# Altium PCB Micro1.PcbDoc
Units mm, origin at the board's own origin, x right, y up, seen from the top; angles counter-clockwise.
Board outline 100 x 50 mm, 2 copper layers (Top Layer, Bottom Layer); 15 components, 27 nets, 103 pads, 20 vias.
Unrouted connection lines stored in the file: 3.
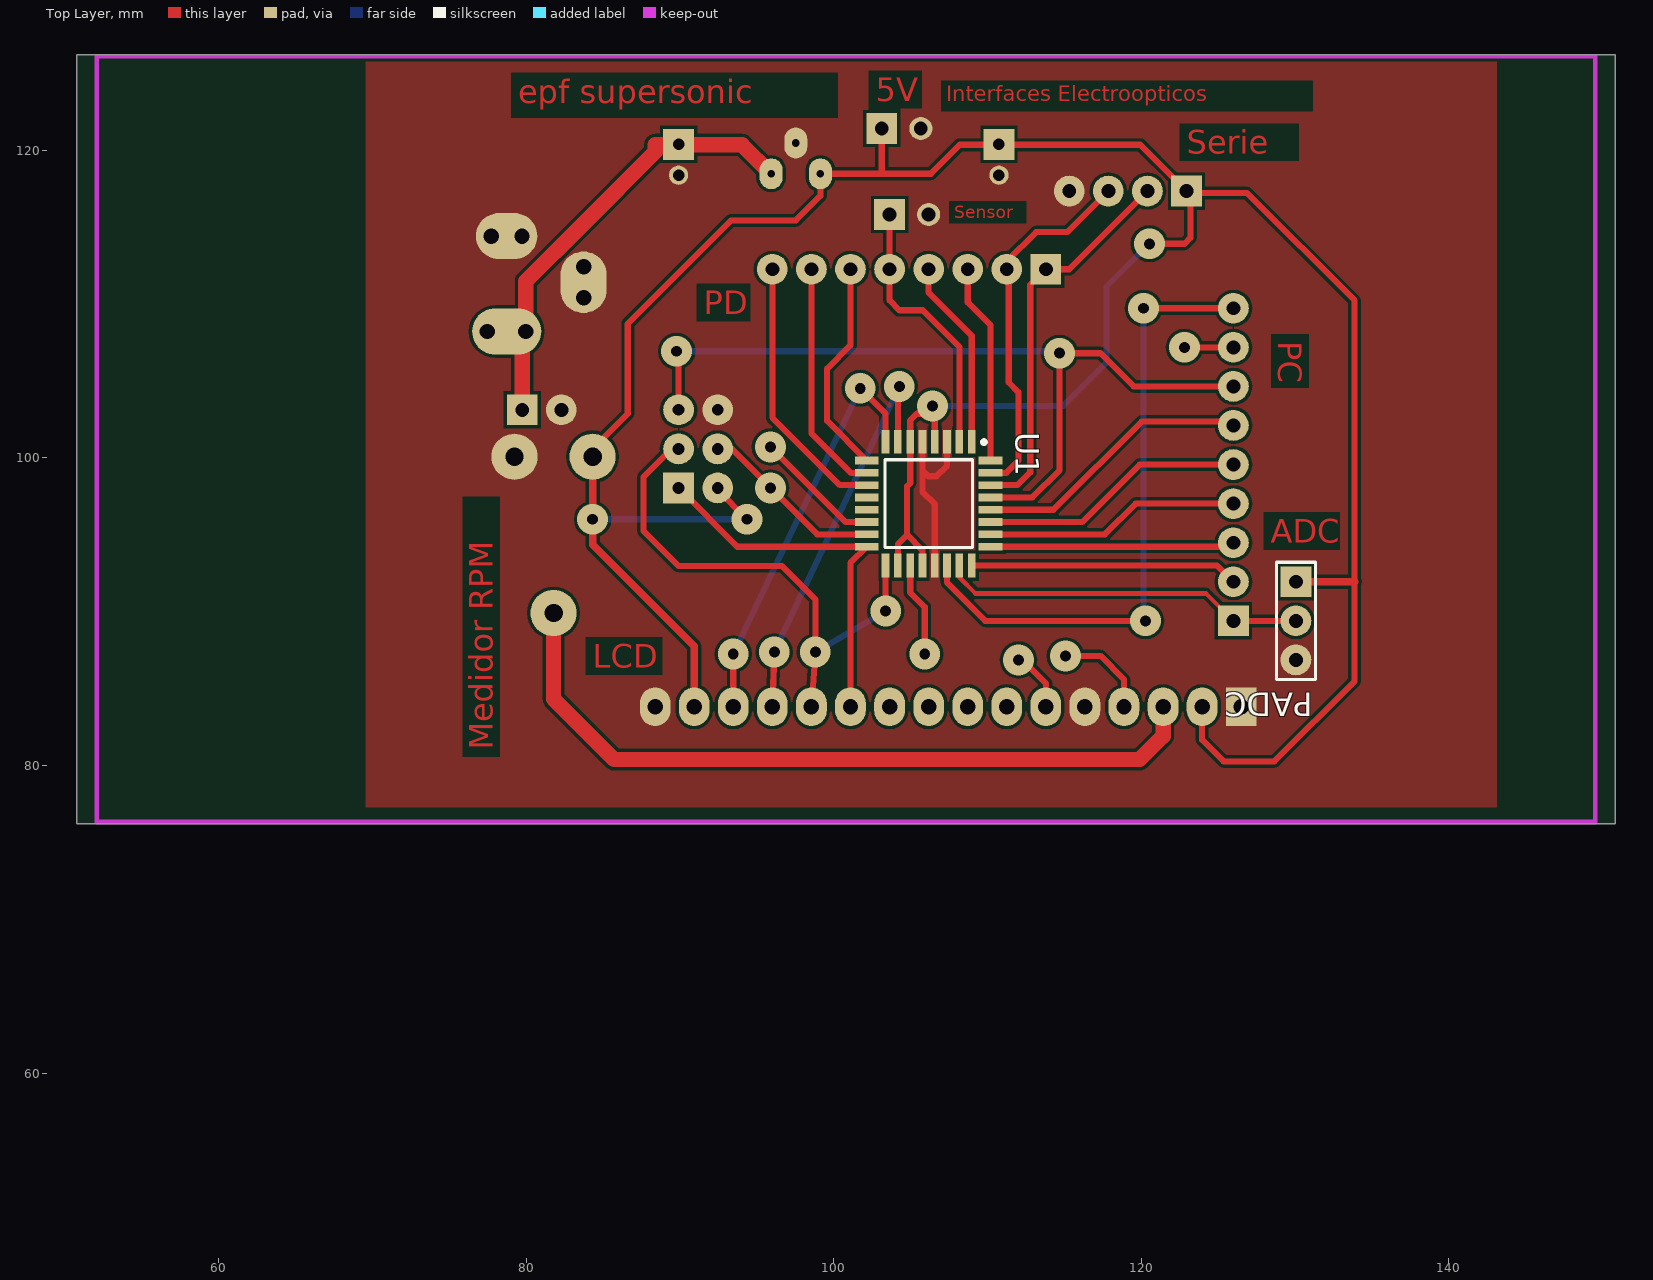
[diagram p0: Top Layer view]
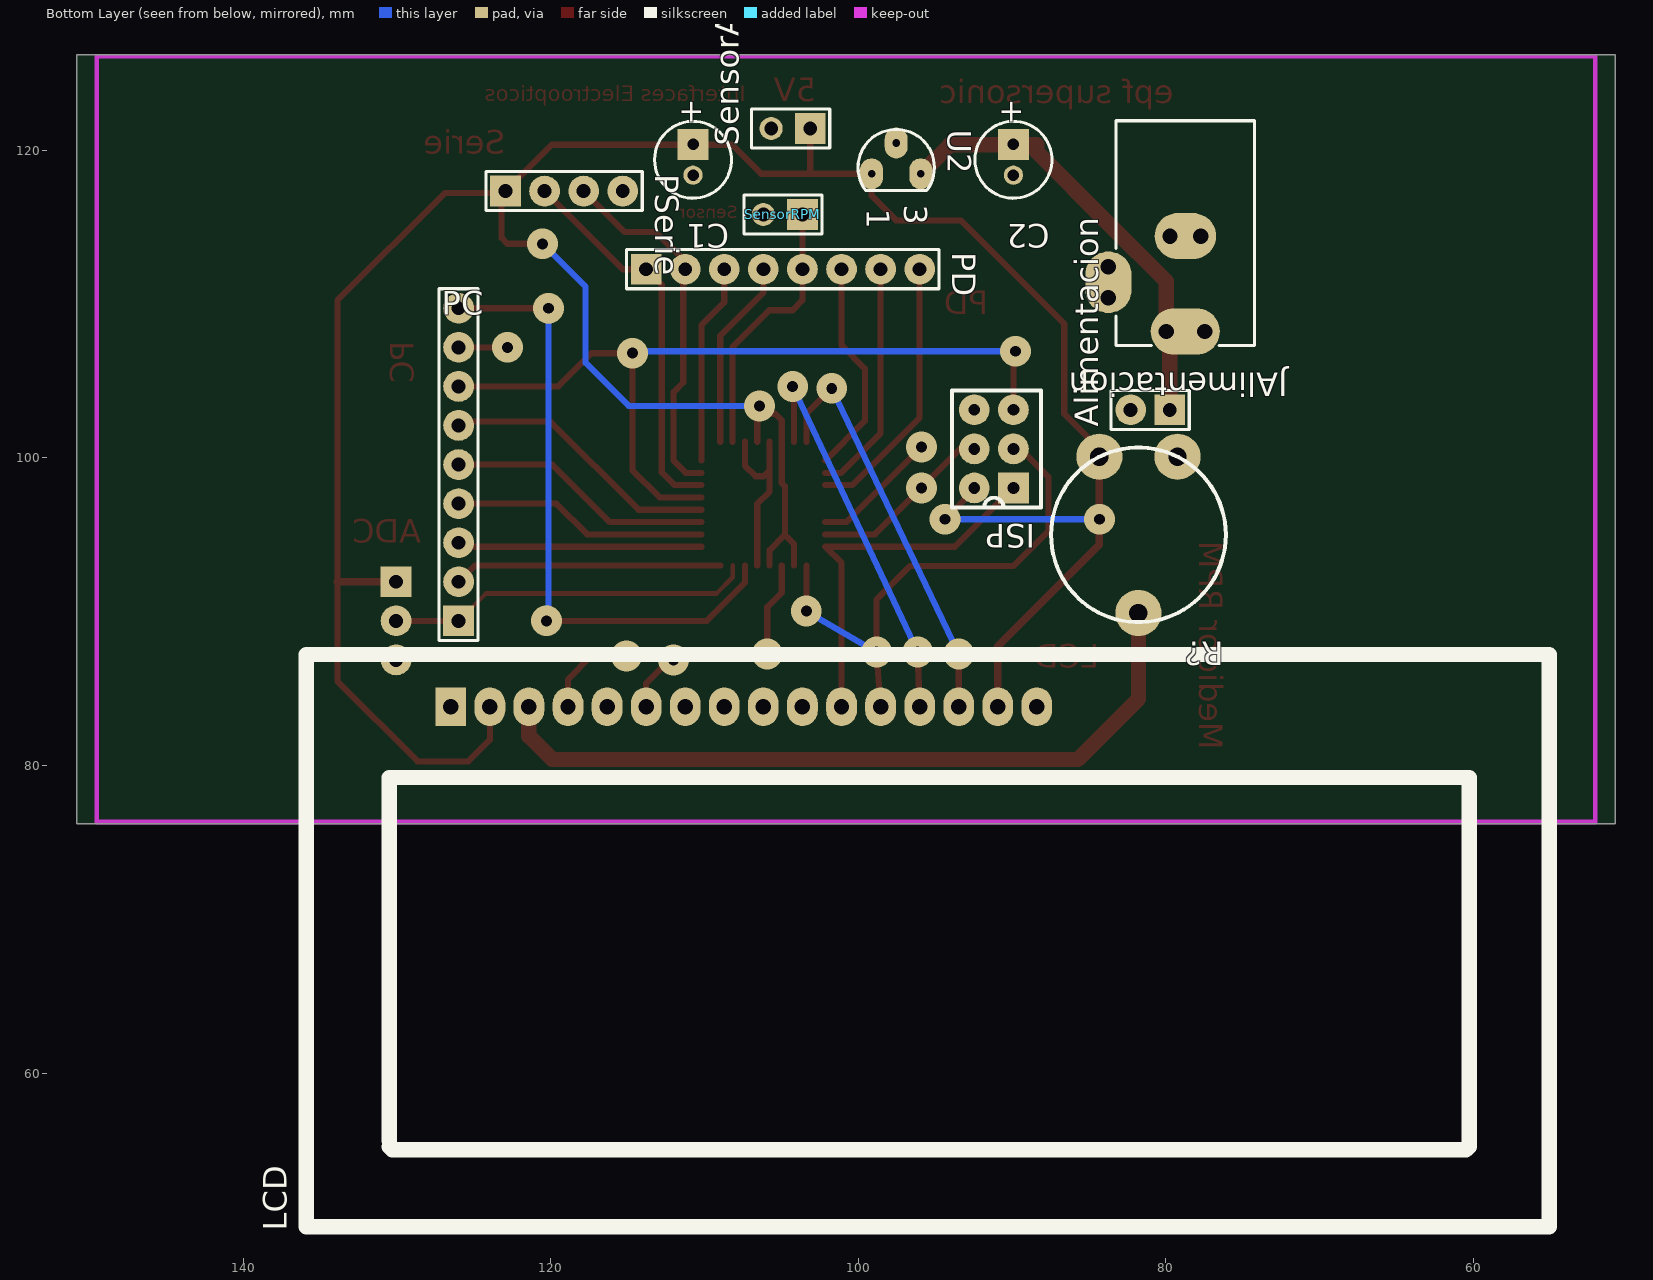
[diagram p1: Bottom Layer view, seen from below]

## Layer stack, top to bottom
Top Layer: signal copper 0.0356
Dielectric: dielectric 0.32, FR-4, Dk 4.8
Bottom Layer: signal copper 0.0356

## Board outline
50.8,76.2 150.8,76.2 150.8,126.2 50.8,126.2

## Design rules (kind name [scope] priority, off if disabled: settings)
Clearance [All] p1: gap=0.2
ComponentClearance [All] p1: gap=0.254 collisioncheckmode=3 verticalgap=0.254
PlaneConnect [All] p1: planeconnectstyle=Direct reliefexpansion=0.508 reliefentries=4 reliefconductorwidth=0.254 reliefairgap=0.254
PolygonConnect [All] p1: connectstyle=Direct reliefconductorwidth=0.254 reliefentries=4 polygonreliefangle="90 Angle"
RoomDefinition microprocesador [InComponentClass('microprocesador')] p1: confinementstyle=ConfineIn formatcopy=TRUE lockcomponents=FALSE outline 54.864,22.86 159.512,22.86 159.512,129.54 54.864,129.54
RoutingVias [All] p1: holewidth=0.8 width=2 viastyle="Through Hole" minholewidth=0.711 minwidth=2 maxholewidth=1.2 maxwidth=3
SolderMaskExpansion [All] p1: expansion=0.102
TestPointUsage [All] p1: valid=0 allowmultiple=FALSE
Testpoint [All] p1: side=15 testpointundercomponent=TRUE minsize=1.016 maxsize=2.54 preferedsize=1.524 minholesize=0 maxholesize=1.016 preferedholesize=0.813 testpointgrid=0.025 style=1023 order=0123456789
Width [All] p1: maxlimit=2 minlimit=0.2 preferedwidth=0.34
17 further rules are at their usual default settings.

## Components (designator, comment, footprint, x,y, rotation, side; value= is the part's Value field where it differs from the comment)
Alimentacion "Header 2" HDR1X2#1 79.756,103.124 r0 bottom
C1 "Cap Pol1" B 110.744,119.38 r270 bottom
C2 "Cap Pol1" B 89.916,119.38 r270 bottom
ISP "*" AVR_ISP 89.916,98.044 r0 bottom
JAlimentacion "PWR2.5" KLD-0202 78.74,121.92 r270 bottom
LCD "LCD" LCD 126.492,83.82 r90 bottom
PADC "Header 3" HDR1X3 130.048,91.948 r270 top
PC "Header 9" HDR1X9 125.984,89.408 r90 bottom
PD "Header 8" HDR1X8 113.792,112.268 r180 bottom
PSerie "Header 4" HDR1X4 122.936,117.348 r180 bottom
R? "Pot" POTENCIOMETRO 81.788,100.076 r0 bottom
SensorAlimentacion "Header 2" HDR1X2#2 103.124,121.412 r0 bottom
SensorRPM "Header 2" HDR1X2#2 103.632,115.824 r0 bottom
U1 "ATmega8L-8AI" 32A 106.172,97.028 r270 top
U2 "L78L05ABZ" TO92 97.536,118.872 r270 bottom

## Footprints (in the part's own frame and the unit in brackets; to place one, negate y for a bottom-side part, rotate by r counter-clockwise, add the part's x,y. Pads: shape width x height; smd on the part's side, far side on the other; paste and mask are expansions set on the pad)
32A [mm] "QFP; 32 Leads; Body 7 x 7 mm; Pitch 0.8 mm"
  rect 1.55x0.5 smd: 1(-4.025,2.8) 2(-4.025,2) 3(-4.025,1.2) 4(-4.025,0.4) 5(-4.025,-0.4) 6(-4.025,-1.2) 7(-4.025,-2) 8(-4.025,-2.8) 17(4.025,-2.8) 18(4.025,-2) 19(4.025,-1.2) 20(4.025,-0.4) 21(4.025,0.4) 22(4.025,1.2) 23(4.025,2) 24(4.025,2.8)
  rect 0.5x1.55 smd: 9(-2.8,-4.025) 10(-2,-4.025) 11(-1.2,-4.025) 12(-0.4,-4.025) 13(0.4,-4.025) 14(1.2,-4.025) 15(2,-4.025) 16(2.8,-4.025) 25(2.8,4.025) 26(2,4.025) 27(1.2,4.025) 28(0.4,4.025) 29(-0.4,4.025) 30(-1.2,4.025) 31(-2,4.025) 32(-2.8,4.025)
  silkscreen extent -4.12,-2.85 2.85,3.73
AVR_ISP [mm]
  rect 2x2 hole 0.762: 0(0,0)
  round 2 hole 0.762: 1(2.54,0) 2(0,-2.54) 3(2.54,-2.54) 4(0,-5.08) 5(2.54,-5.08)
  silkscreen extent -1.8,-6.35 4,1.27
B [mm] "Capacitor, Electrolytic, Radial; Body 5 x 6.8 mm (Dia.xH typ); Pin Spacing 2 mm (typ)"
  rect 2x2 hole 0.75: 1(-1,0)
  round 1.25 hole 0.75: 2(1,0)
  silkscreen extent -2.5,-2.5 2.5,2.5
HDR1X2#1 [mm] "Connector; Header; 2 Position"
  rect 2x2 hole 0.9: 1(0,0)
  round 2 hole 0.9: 2(2.54,0)
  silkscreen extent -1.27,-1.27 3.81,1.27
HDR1X2#2 [mm] "Connector; Header; 2 Position"
  rect 2x2 hole 0.9: 1(0,0)
  round 1.5 hole 0.9: 2(2.54,0)
  silkscreen extent -1.27,-1.27 3.81,1.27
HDR1X3 [mm] "Connector; Header; 3 Position"
  rect 2x2 hole 0.9: 1(0,0)
  round 2 hole 0.9: 2(2.54,0) 3(5.08,0)
  silkscreen extent -1.27,-1.27 6.35,1.27
HDR1X4 [mm] "Connector; Header; 4 Position"
  rect 2x2 hole 0.9: 1(0,0)
  round 2 hole 0.9: 2(2.54,0) 3(5.08,0) 4(7.62,0)
  silkscreen extent -1.27,-1.27 8.89,1.27
HDR1X8 [mm] "Connector; Header; 8 Position"
  rect 2x2 hole 0.9: 1(0,0)
  round 2 hole 0.9: 2(2.54,0) 3(5.08,0) 4(7.62,0) 5(10.16,0) 6(12.7,0) 7(15.24,0) 8(17.78,0)
  silkscreen extent -1.27,-1.27 19.05,1.27
HDR1X9 [mm] "Connector; Header; 9 Position"
  rect 2x2 hole 0.9: 1(0,0)
  round 2 hole 0.9: 2(2.54,0) 3(5.08,0) 4(7.62,0) 5(10.16,0) 6(12.7,0) 7(15.24,0) 8(17.78,0) 9(20.32,0)
  silkscreen extent -1.27,-1.27 21.59,1.27
KLD-0202 [mm] "DC Power Jack, 2.5mm, KLD Series, PCB Mount"
  oval 3x4.5 all layers, no hole: 1(13.7,0)
  round 1.5 hole 1: 1A(13.7,-1.25) 1B(13.7,1.25) 2A(7.5,-1) 2B(7.5,1) 3A(9.5,-5) 3B(11.5,-5)
  oval 3x4 all layers, no hole: 2(7.5,0)
  oval 4x3 all layers, no hole: 3(10.5,-5)
  silkscreen extent 0,-4.5 14.6,4.5
LCD [mm]
  rect 2.5x2 hole 1: 0(0,0)
  oval 2.5x2 hole 1: 1(0,-2.54) 2(0,-5.08) 3(0,-7.62) 4(0,-10.16) 5(0,-12.7) 6(0,-15.24) 7(0,-17.78) 8(0,-20.32) 9(0,-22.86) 10(0,-25.4) 11(0,-27.94) 12(0,-30.48) 13(0,-33.02) 14(0,-35.56) 15(0,-38.1)
  silkscreen extent -33.8,-71.4 3.4,9.4
POTENCIOMETRO [mm]
  round 3 hole 1.2: 1(-2.54,0) 2(2.54,0) 3(0,10.16)
  silkscreen extent -5.68,-0.6 5.68,10.76
TO92 [mm] "TO, Flat Index; 3 In-Line, Axial Leads; Body Dia. 4.5mm; Leads 0.51 x 0.48 mm (max)"
  oval 2x1.5 hole 0.5: 1(0.4,-1.6) 2(-1.6,0) 3(0.4,1.6)
  silkscreen extent -2.48,-2.48 1.5,2.48

## Part data
Alimentacion SensorAlimentacion SensorRPM: "Header, 2-Pin"
C1 C2: "Polarized Capacitor (Radial)"
ISP: library part AVR_ISP
JAlimentacion: "Low Voltage Power Supply Connector"
PADC: "Header, 3-Pin"
PC: library part "Header 8", "Header, 8-Pin"
PD: "Header, 8-Pin"
PSerie: "Header, 4-Pin"
U1: "8-Bit AVR Microcontroller with 8K Bytes of In-System Programmable Flash Memory"
U2: "Positive Voltage Regulator"

## Via types
v1: diameter 2, hole 0.711, Top Layer to Bottom Layer, 20 vias

## Nets (pads, with @x,y where several pads share a name; then routed paths per layer and width w, separated by ;. In a path a pad name is that pad's centre, name@x,y a point inside that pad or via, vN(x,y) a via of type N, cw(c..) or ccw(c..) an arc to the next point about the centre after c; other vN are vias at no path point)
5V: C1.1 ISP.1 LCD.1 LCD.14 PADC.1 PSerie.1 R?.2 SensorAlimentacion.1 U1.4 U1.6 U1.18 U1.20 U2.1 | length 188.2
  Top Layer w0.4: R?.2 84.328,100.584 86.614,102.87 86.614,108.712 93.345,115.443 97.536,115.443 99.136,117.043 U2.1 106.32,118.472 108.204,120.356 119.928,120.356 PSerie.1 ; ISP.1 92.456,97.917 v1(94.361,96.012) ; ISP.1@92.916,98.044 ISP.1@92.916,98.346 ; 103.124,118.472 SensorAlimentacion.1 ; U1.18 104.172,94.393 104.775,94.996 ; U1.20 105.772,93.999 104.775,94.996 ; v1(106.426,103.378) 106.172,103.124 v1@106.172,102.87 ; U1.4 106.572,102.47 v1@106.172,102.87 ; v1(120.523,113.919) 122.809,113.919 123.19,114.3 PSerie.1@123.19,117.094 ; PSerie.1@123.015,117.269 123.063,117.221 126.873,117.221 133.858,110.236 133.858,85.471 128.651,80.264 125.349,80.264 123.952,81.661 LCD.1 ; 104.775,94.996 104.775,98.171 104.972,98.368 104.972,102.432 105.41,102.87 v1@106.172,102.87
  Top Layer w0.5: R?.2 84.328,94.361 90.932,87.757 LCD.14 ; PADC.1 133.858,91.948
  Bottom Layer w0.4: v1(84.328,96.012) v1(94.361,96.012) ; v1(106.426,103.378) 114.935,103.378 117.729,106.172 117.729,111.125 v1(120.523,113.919)
GND: Alimentacion.2 C1.2 C2.2 ISP.5 JAlimentacion.2 JAlimentacion.2A JAlimentacion.2B JAlimentacion.3 JAlimentacion.3A JAlimentacion.3B LCD.0 LCD.4 LCD.15 PADC.3 PSerie.4 R?.1 SensorAlimentacion.2 SensorRPM.2 U1.3 U1.5 U1.21 U2.2 | length 12
  Top Layer w0.4: 105.772,99.187 106.153,98.806 106.68,98.806 107.372,99.498 U1.3 ; U1.5 105.772,97.809 106.572,97.009 U1.21
MISO: ISP.0 LCD.10 U1.16 | length 24.7
  Top Layer w0.4: ISP.0 93.732,94.228 U1.16 101.092,93.173 LCD.10
MOSI: ISP.3 LCD.5 U1.15 | length 15.8
  Top Layer w0.4: ISP.3@92.916,101.044 98.932,95.028 U1.15 ; v1(112.014,86.868) 112.141,86.995 113.792,85.344 LCD.5
  other v1: 95.885,98.044
NetLCD_2: LCD.2 R?.3 | length 49.4
  Top Layer w1: R?.3 81.788,84.328 85.725,80.391 119.888,80.391 121.412,81.915 LCD.2
NetLCD_3: LCD.3 U1.14 | length 14.5
  Top Layer w0.4: v1(95.885,100.711) 100.768,95.828 U1.14 ; v1(115.062,87.122) 117.348,87.122 118.872,85.598 LCD.3
NetLCD_12: LCD.12 U1.7 | length 26.3
  Top Layer w0.4: LCD.12 v1(96.139,87.376) ; U1.7 104.172,104.553 v1(104.267,104.648)
  Bottom Layer w0.4: v1(96.139,87.376) v1(104.267,104.648)
NetLCD_13: LCD.13 U1.8 | length 26.7
  Top Layer w0.4: LCD.13 v1(93.472,87.249) ; v1(101.727,104.521) 103.372,102.876 U1.8
  Bottom Layer w0.4: v1(93.472,87.249) v1(101.727,104.521)
NetPADC_2: PADC.2 PC.1 U1.23 | length 23.8
  Top Layer w0.3: U1.23 108.172,92.234 109.22,91.186 124.206,91.186 PC.1
  Top Layer w0.4: PC.1 PADC.2
NetPC_2: PC.2 U1.24 | length 17.4
  Top Layer w0.4: U1.24 124.929,93.003 PC.2
NetPC_3: PC.3 U1.25 | length 15.9
  Top Layer w0.4: U1.25 125.724,94.228 PC.3
NetPC_4: PC.4 U1.26 | length 16.6
  Top Layer w0.4: U1.26 117.634,95.028 119.634,97.028 PC.4
NetPC_5: PC.5 U1.27 | length 17.3
  Top Layer w0.4: U1.27 116.148,95.828 119.888,99.568 PC.5
NetPC_6: PC.6 U1.28 | length 18.3
  Top Layer w0.4: U1.28 114.281,96.628 120.015,102.362 125.73,102.362 PC.6
NetPC_8: PC.8 U1.19 | length 9.3
  Top Layer w0.4: U1.19 104.972,91.243 105.918,90.297 v1(105.918,87.249) ; v1(122.809,107.188) PC.8
NetPC_9: PC.9 U1.22 | length 41.3
  Top Layer w0.4: U1.22 107.372,91.891 109.855,89.408 v1(120.269,89.408) ; v1(120.142,109.728) PC.9
  Bottom Layer w0.4: v1(120.142,109.728) 120.142,89.535 v1(120.269,89.408)
NetPD_1: PD.1 PSerie.2 U1.30 | length 25.3
  Top Layer w0.4: U1.30 111.944,98.228 112.776,99.06 112.776,111.252 PD.1 115.316,112.268 PSerie.2
NetPD_2: PD.2 PSerie.3 U1.31 | length 23.9
  Top Layer w0.4: U1.31 111.22,99.028 112.014,99.822 112.014,104.267 111.379,104.902 111.379,112.141 PD.2 111.252,112.776 113.157,114.681 115.189,114.681 PSerie.3
NetPD_3: PD.3 U1.32 | length 13.1
  Top Layer w0.4: PD.3 108.712,110.109 110.197,108.624 U1.32
NetPD_4: PD.4 U1.1 | length 12.4
  Top Layer w0.4: PD.4 106.172,110.744 108.972,107.944 U1.1
NetPD_5: PD.5 SensorRPM.1 U1.2 | length 17.5
  Top Layer w0.4: SensorRPM.1 103.632,110.236 104.267,109.601 105.791,109.601 108.172,107.22 U1.2
NetPD_6: PD.6 U1.9 | length 14.1
  Top Layer w0.4: PD.6 101.092,107.315 99.568,105.791 99.568,102.407 U1.9
NetPD_7: PD.7 U1.10 | length 15.3
  Top Layer w0.4: PD.7 98.552,101.6 101.124,99.028 U1.10
NetPD_8: PD.8 U1.11 | length 17.6
  Top Layer w0.4: PD.8 96.012,102.616 100.4,98.228 U1.11
RES: ISP.4 PC.7 U1.29 | length 52.9
  Top Layer w0.4: v1(89.789,106.934) 89.916,106.807 ISP.4@89.916,104.044 ; U1.29 112.922,97.428 114.681,99.187 v1(114.681,106.807) 117.348,106.807 119.507,104.648 PC.7
  Bottom Layer w0.4: v1(89.789,106.934) 114.554,106.934 v1(114.681,106.807)
SCK: ISP.2 LCD.11 U1.17 | length 35
  Top Layer w0.4: ISP.2@89.916,101.044 87.63,98.758 87.63,95.25 89.916,92.964 96.647,92.964 98.806,90.805 v1(98.806,87.376) LCD.11 ; U1.17 v1(103.378,90.043)
  Bottom Layer w0.4: v1(98.806,87.376) v1(103.378,90.043)
VCC: Alimentacion.1 C2.1 JAlimentacion.1 JAlimentacion.1A JAlimentacion.1B U2.3 | length 29.1
  Top Layer w1: Alimentacion.1 79.756,107.986 JAlimentacion.1A 79.99,111.486 83.693,115.189 88.392,119.888 88.392,120.356 94.052,120.356 U2.3
pads on no net: LCD.6 LCD.7 LCD.8 LCD.9 U1.12 U1.13

## Polygon pours and split planes (outlines as drawn)
GND on Top Layer (solid, remove dead copper): 69.571,126.961 69.571,77.304 143.104,77.304 143.104,127.088 69.317,127.088 69.317,126.199 69.19,126.199

## Keep-outs
Keep-Out Layer:
  lines w0.3: 52.1,76.327 149.5,76.327 149.5,126.111 52.1,126.111 52.1,76.327

## Other copper
Top Layer:
  text "5V" at 102.743,123.19 h1.52
  text "Interfaces Electroopticos" at 107.315,123.19 h1
  text "epf supersonic" at 79.502,123.063 h1.52
  text "Serie" at 122.936,119.761 h1.52
  text "Sensor" at 107.823,115.57 h0.8
  text "PD" at 91.567,109.347 h1.52
  text "PC" at 128.905,107.569 h1.52 r270
  text "ADC" at 128.397,94.488 h1.52
  text "LCD" at 84.328,86.36 h1.52
  text "Medidor RPM" at 77.851,81.026 h1.52 r90

## Silkscreen, mask and mechanical layers (free items; w line width, h text height)
Drill Drawing:
  text ".LEGEND" at 155.88,81.28 h1.52
  text "Drill Drawing." at 155.88,78.74 h1.52

## Dimensions
52.1,76.327 to 149.5,76.327 on Mechanical 1
52.1,76.327 to 52.1,126.111 on Mechanical 1

## Text inside footprints (layer, text, board x,y; h text height)
C1: Bottom Overlay "+" at 111.494,123.355 h1.5 r90
C2: Bottom Overlay "+" at 90.666,123.355 h1.5 r90
JAlimentacion: Mechanical 1 "Mech 2 - Clearance, move to internal plane if present" at 73.674,121.634 h0.3 r90; Mechanical 1 "Mech 1 - Slot cut-out" at 73.174,121.634 h0.3 r90; Mechanical 1 "Assign keep-out area to slot" at 72.174,121.634 h0.3 r90; Mechanical 1 "Alert PCB fab to slot details" at 72.674,121.634 h0.3 r90
U2: Bottom Overlay "1" at 99.436,116.212 h1.5 r90; Bottom Overlay "3" at 97.026,116.442 h1.5 r90